# EAGLE board Supplemental Power Switch System (EAGLE 8.1.0)
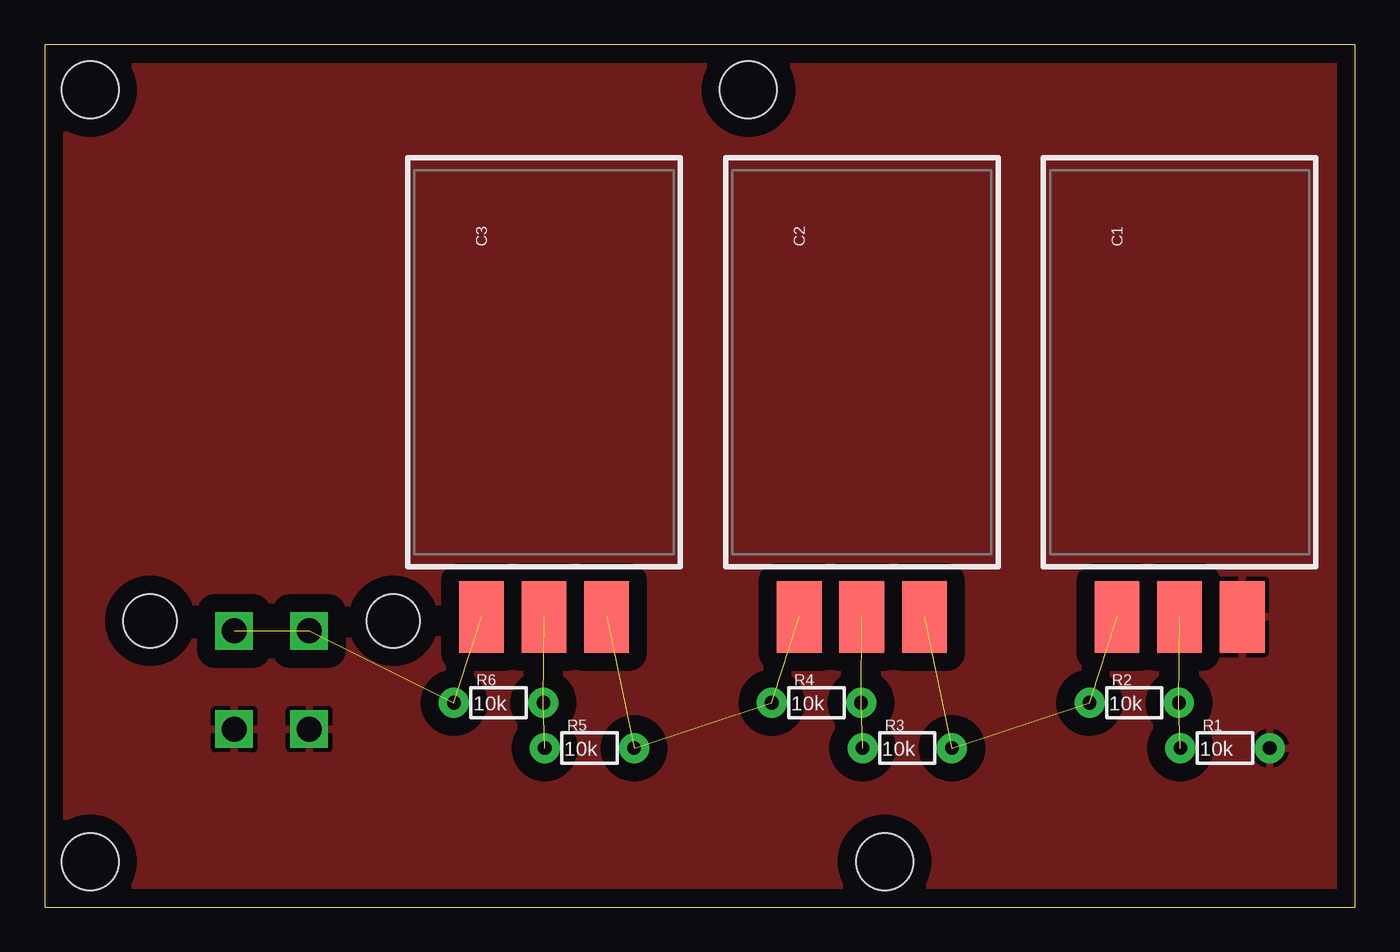
[diagram p0: board, top side]
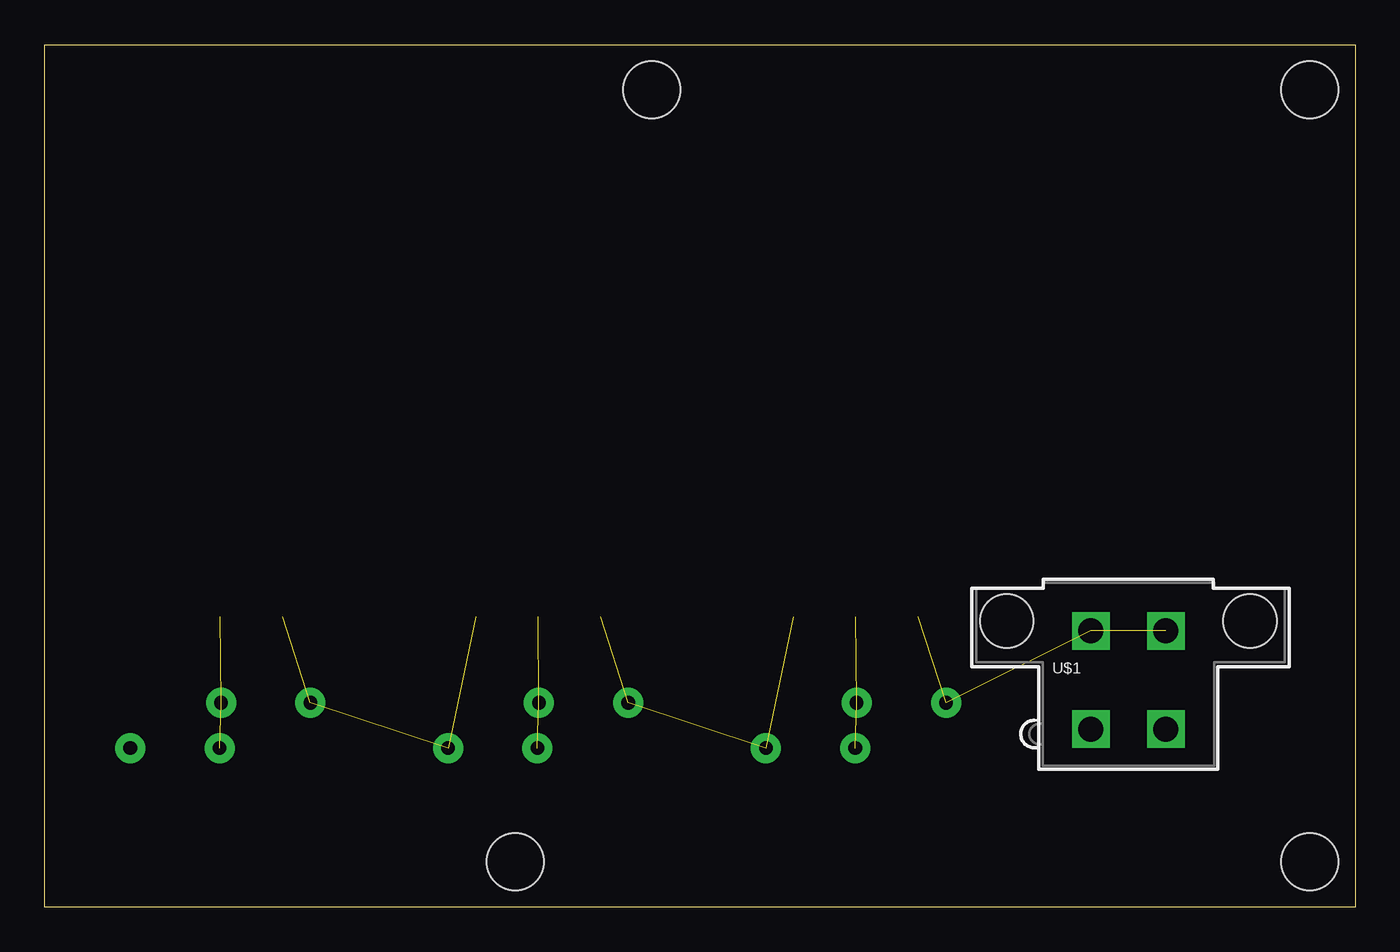
[diagram p1: board, bottom side, seen from below]

Size 73.33 x 48.25 mm. Coordinates in mm from the lower left corner, seen from the top.
Outline: 0,0 73.33,0 73.33,48.25 0,48.25 0,0
Copper layers (1*16): Top 0.035mm / dielectric 1.5mm / Bottom 0.035mm
Design rules "default": minimum track width 10mil, minimum drill 24mil, track to track 8mil, track to pad 8mil, pad to pad 8mil, via to via 8mil, smd to smd 8mil, copper to edge 40mil, drill to drill 8mil, minimum pad ring 10mil, minimum via ring 8mil, stop-mask expansion 4mil, vias tented up to drill 0mil, thermal gap 10mil
Holes 3.2 mm at 2.54,2.54 46.99,2.54 39.37,45.72 2.54,45.72

## Footprints (pad centres in the part's own frame; a part is rotated, then mirrored left to right if it is on the bottom)
DMF = smd 4 x 2.5: + 14.25,-3.5; - 14.25,3.5; B 14.25,0
1/6W-RES = drill 0.762 pad 1.676: 1 -2.5,0; 2 2.5,0
42385-MINI-FIT = drill 1.4 square: P$1 -2.1,-2.75; P$2 2.1,-2.75; P$3 -2.1,2.75; P$4 2.1,2.75 | hole 3: -6.8,3.31; 6.8,3.31

## Placement (x,y rotation side)
C1  SUPER-CAPACITOR  [DMF]  63.5,30.48 270 top
C2  SUPER-CAPACITOR  [DMF]  45.72,30.48 270 top
C3  SUPER-CAPACITOR  [DMF]  27.94,30.48 270 top
FRAME1  FRAME-LETTERNO_PACKAGE  [DUMMY]  -13.97,15.24 0 top  (outside the outline)
R1  10k  [1/6W-RES]  66.04,8.89 0 top
R2  10k  [1/6W-RES]  60.96,11.43 0 top
R3  10k  [1/6W-RES]  48.26,8.89 0 top
R4  10k  [1/6W-RES]  43.18,11.43 0 top
R5  10k  [1/6W-RES]  30.48,8.89 0 top
R6  10k  [1/6W-RES]  25.4,11.43 0 top
U$1  42385-015247040  [42385-MINI-FIT]  12.7,12.7 0 bottom

## Library data of the parts
C1-C3 U$1 = Hooman
FRAME1 = SparkFun-Aesthetics; DESIGNER: Nobody; VERSION: v01
R1-R6 = SparkFun-Resistors

## Nets
C1-2: C1.+ C2.- R2.1 R3.2
C2-3: C2.+ C3.- R4.1 R5.2
GND: C1.- R1.2 U$1.P$1 U$1.P$2
N$1: C1.B R1.1 R2.2
N$3: C2.B R3.1 R4.2
N$5: C3.B R5.1 R6.2
VCC: C3.+ R6.1 U$1.P$3 U$1.P$4

## Tracks (layer width: path | path; a pad name or v marks a point on that pad's centre or on a via)
C1-2  (3 unrouted)
C2-3  (3 unrouted)
GND
  pour Top (isolate 1.016): 0,48.26 72.39,48.26 72.39,0 0,0
N$1  (2 unrouted)
N$3  (2 unrouted)
N$5  (2 unrouted)
VCC  (3 unrouted)